# Altium PCB Bioscope-Input-01.PcbDoc
Units mm, origin at the board's own origin, x right, y up, seen from the top; angles counter-clockwise.
Board outline 100 x 50 mm, 2 copper layers (Top Layer, Bottom Layer); 54 components, 35 nets, 143 pads, 3 vias.
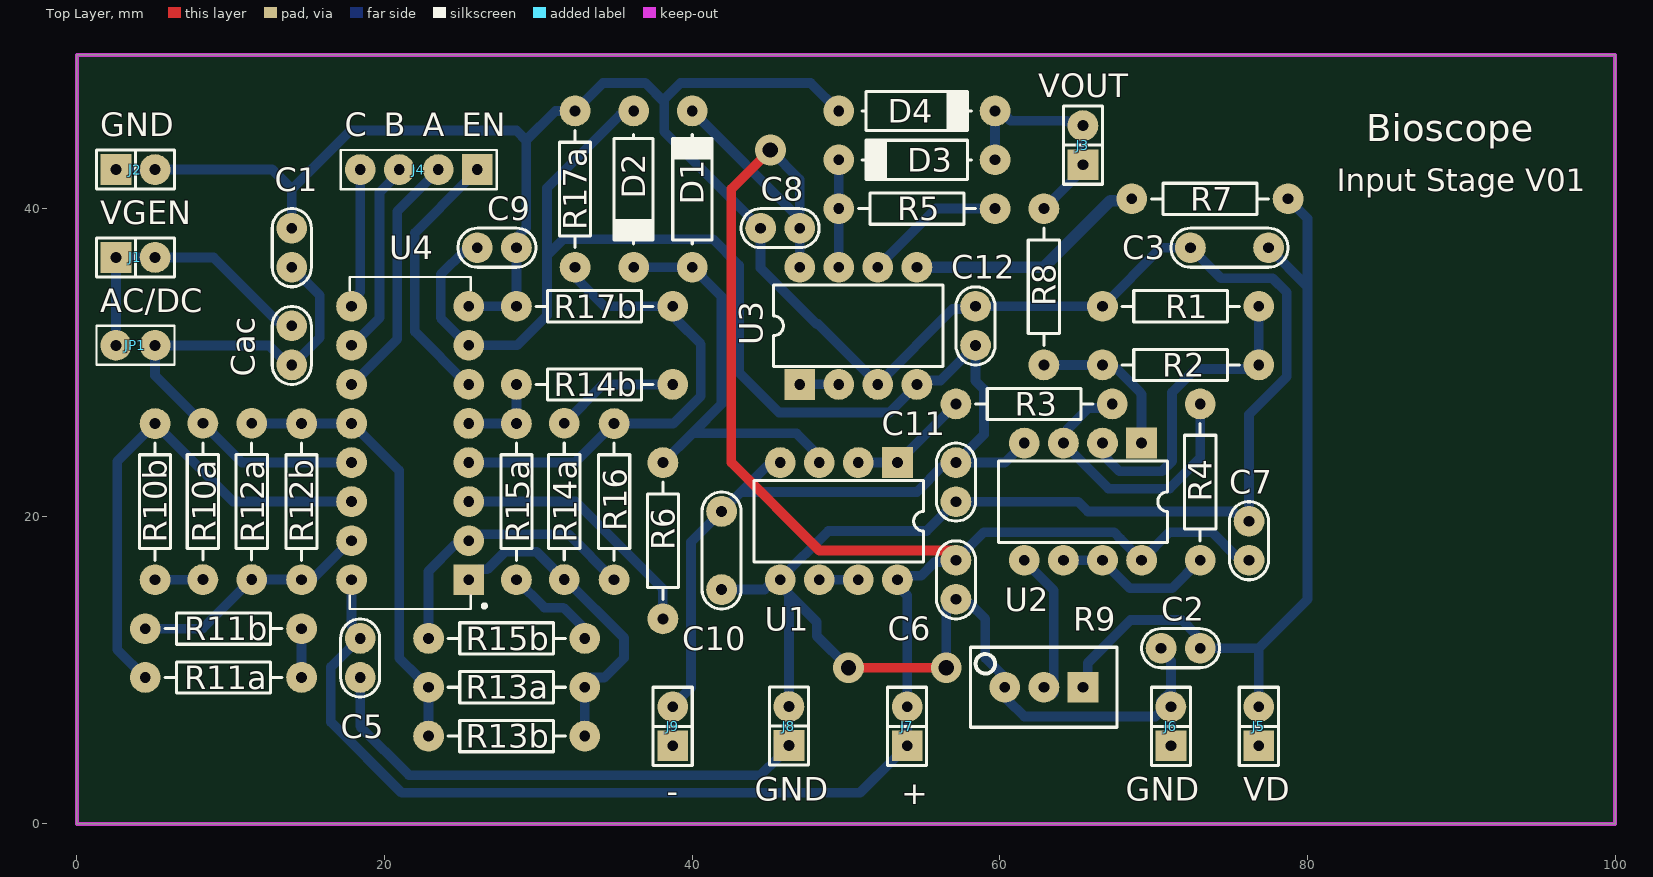
[diagram p0: Top Layer view]
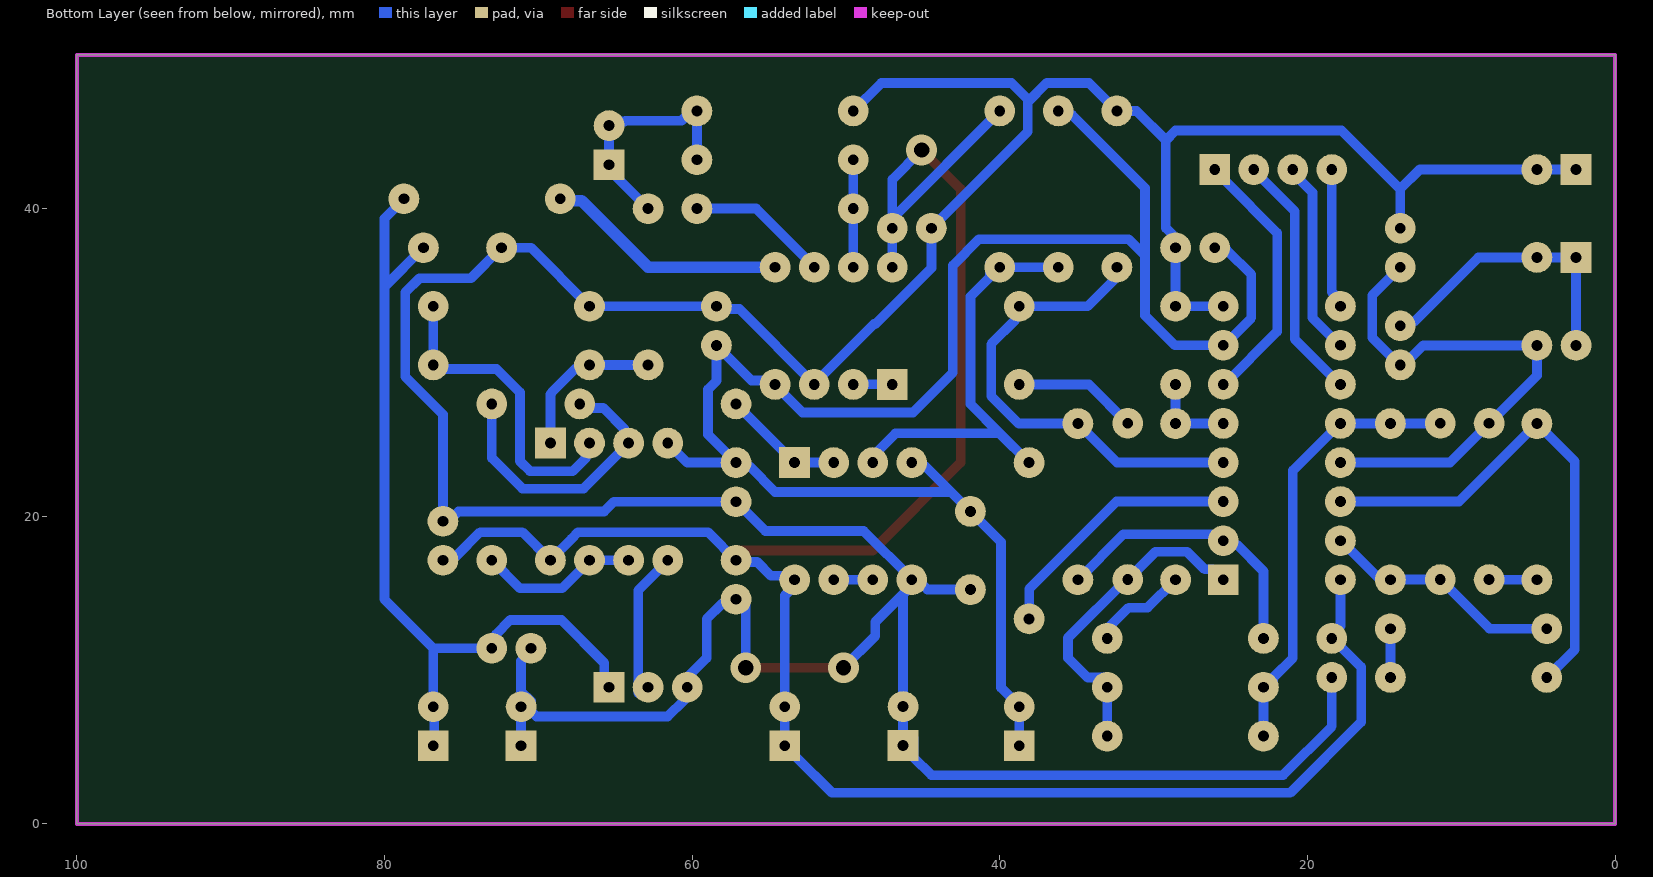
[diagram p1: Bottom Layer view, seen from below]

## Layer stack, top to bottom
Top Solder: solder mask 0.0102, Solder Resist, Dk 3.5
Top Layer: signal copper 0.0356
Dielectric 1: dielectric 0.32, FR-4, Dk 4.8
Bottom Layer: signal copper 0.0356
Bottom Solder: solder mask 0.0102, Solder Resist, Dk 3.5

## Board outline
0,0 0,50 100,50 100,0

## Design rules (kind name [scope] priority, off if disabled: settings)
Clearance [All] p1: gap=0.508 ignorepadtopadclearanceinfootprint=FALSE
ComponentClearance [All] p1: gap=0.254 collisioncheckmode=3 verticalgap=0 showdistances=FALSE
HoleSize [All] p1: absolutevalues=TRUE maxlimit=25.4 minlimit=0.025 maxpercent=80.000 minpercent=20.000
HoleToHoleClearance [All] p1: gap=0.762 allowstackedmicrovias=TRUE
PolygonConnect [All] p1: connectstyle=Relief reliefconductorwidth=0.254 reliefentries=4 polygonreliefangle="90 Angle" airgapwidth=0.254
RoutingVias [All] p1: holewidth=1 width=2 viastyle="Through Hole" minholewidth=1 minwidth=2 maxholewidth=1 maxwidth=2
SilkToSolderMaskClearance [IsPad] p1: minsilkscreentomaskgap=0 clearancetoexposedcopper=TRUE
SolderMaskExpansion [All] p1: expansion=0.102 istentingtop=FALSE
Width [All] p1: maxlimit=1.016 minlimit=0.635 preferedwidth=0.635
26 further rules are at their usual default settings.

## Components (designator, comment, footprint, x,y, rotation, side; value= is the part's Value field where it differs from the comment)
C1 "22pF" CAP100 13.97,37.465 r90 top
C2 "100nF" CAP100 71.755,11.43 r180 top
C3 "100nF" CAP200 74.93,37.465 r180 top
C5 "100nF" CAP100 18.415,10.795 r270 top
C6 "100nF" CAP100 57.15,15.875 r270 top
C7 "100nF" CAP100 76.2,18.415 r90 top
C8 "100nF" CAP100 45.72,38.735 r180 top
C9 "100nF" CAP100 27.305,37.465 r180 top
C10 "100nF" CAP200 41.91,17.78 r90 top
C11 "100nF" CAP100 57.15,22.225 r90 top
C12 "100nF" CAP100 58.42,32.385 r270 top
Cac "100nF" CAP100 13.97,31.115 r270 top
D1 "1N4148" DO41 40.005,41.275 r90 top
D2 "1N4148" DO41 36.195,41.275 r270 top
D3 "1N4148" DO41 54.61,43.18 r180 top
D4 "1N4148" DO41 54.61,46.355 r0 top
J1 "JUMPER" JUMPER2 3.81,36.83 r0 top
J2 "JUMPER" JUMPER2 3.81,42.545 r0 top
J3 "JUMPER" JUMPER2 65.405,44.133 r90 top
J4 "Pin Header 4F" PINHEADER-4F 22.225,42.545 r180 top
J5 "JUMPER" JUMPER2 76.835,6.35 r90 top
J6 "JUMPER" JUMPER2 71.12,6.35 r90 top
J7 "JUMPER" JUMPER2 53.975,6.35 r90 top
J8 "JUMPER" JUMPER2 46.29,6.365 r90 top
J9 "JUMPER" JUMPER2 38.735,6.35 r90 top
JP1 "Jumper" JUMPER-HEADER 3.81,31.115 r0 top
R1 "10K" RES400 66.675,33.655 r0 top
R2 "10K" RES400 76.835,29.845 r180 top
R3 "10K" RES400 57.15,27.305 r0 top
R4 "10K" RES400 73.025,17.145 r90 top
R5 "8.2K" RES400 59.69,40.005 r180 top
R6 "1K" RES400 38.1,13.335 r90 top
R7 "10K" RES400 78.74,40.64 r180 top
R8 "1K" RES400 62.865,29.845 r90 top
R9 "PRESET" "PRESET V" 62.865,8.89 r180 top
R10a "10K" RES400 8.19,15.89 r90 top
R10b "390K" RES400 5.08,26.035 r270 top
R11a "150K" RES400 14.605,9.525 r180 top
R11b "150K" RES400 4.445,12.7 r0 top
R12a "180K" RES400 11.365,26.05 r270 top
R12b "470K" RES400 14.605,26.035 r270 top
R13a "56K" RES400 33.02,8.89 r180 top
R13b "620K" RES400 33.02,5.715 r180 top
R14a "39K" RES400 31.685,26.05 r270 top
R14b "1K" RES400 28.575,28.575 r0 top
R15a "10K" RES400 28.575,15.875 r90 top
R15b "10K" RES400 22.86,12.065 r0 top
R16 "10K" RES400 34.925,26.035 r270 top
R17a "100K" RES400 32.385,46.355 r270 top
R17b "100K" RES400 28.575,33.655 r0 top
U1 "TL082P" P008 49.53,19.685 r180 top
U2 "LM833N" DIP8 65.405,20.955 r180 top
U3 "LM833N" DIP8 50.8,32.385 r0 top
U4 "CD4051" SOIC16 25.475,15.88 r180 top

## Footprints (in the part's own frame and the unit in brackets; to place one, negate y for a bottom-side part, rotate by r counter-clockwise, add the part's x,y. Pads: shape width x height; smd on the part's side, far side on the other; paste and mask are expansions set on the pad)
CAP100 [mm]
  round 2 hole 0.7: 1(-1.27,0) 2(1.27,0)
  silkscreen extent -2.54,-1.27 2.54,1.27, body extent -2.92,-0.84 2.92,0.86, height 6.12
CAP200 [mm]
  round 2 hole 0.7: 1(-2.54,0) 2(2.54,0)
  silkscreen extent -3.81,-1.27 3.81,1.27, body extent -2.79,-1.17 2.79,1.12, height 6.24
DIP8 [mm] "DIP; 8 Leads; Row Spacing 7.62 mm; Pitch 2.54 mm"
  rect 2x2 hole 0.7: 1(-3.81,-3.81)
  round 2 hole 0.7: 2(-1.27,-3.81) 3(1.27,-3.81) 4(3.81,-3.81) 5(3.81,3.81) 6(1.27,3.81) 7(-1.27,3.81) 8(-3.81,3.81)
  silkscreen extent -5.5,-2.65 5.5,2.65
DO41 [mm]
  round 2 hole 0.7: 1(-5.08,0) 2(5.08,0)
  silkscreen extent -3.56,-1.27 3.56,1.27, body extent -5.46,-1.19 5.46,1.37, height 2.03
JUMPER2 [mm]
  rect 2x2 hole 0.7: 1(-1.27,0)
  round 2 hole 0.7: 2(1.27,0)
  silkscreen extent -2.54,-1.27 2.54,1.27, body extent -2.46,-1.27 2.54,1.27, height 9.5
JUMPER-HEADER [mm]
  round 2 hole 0.7: 1(-1.27,0) 2(1.27,0)
  silkscreen extent -2.54,-1.27 2.54,1.27, body extent -2.54,-1.27 2.54,1.27, height 16.15
P008 [mm] "DIP; 8 Leads; Row Spacing 7.62 mm; Pitch 2.54 mm"
  rect 2x2 hole 0.7: 1(-3.81,-3.81)
  round 2 hole 0.7: 2(-1.27,-3.81) 3(1.27,-3.81) 4(3.81,-3.81) 5(3.81,3.81) 6(1.27,3.81) 7(-1.27,3.81) 8(-3.81,3.81)
  silkscreen extent -5.5,-2.65 5.5,2.65
PINHEADER-4F [mm]
  rect 2x2 hole 0.7: 1(-3.81,0)
  round 2 hole 0.7: 2(-1.27,0) 3(1.27,0) 4(3.81,0)
  silkscreen extent -5.08,-1.27 5.08,1.27, body extent -5.33,-1.27 5.33,1.27, height 8.51
"PRESET V" [mm]
  rect 2x2 hole 0.7: 1(-2.54,0)
  round 2 hole 0.7: 2(0,0) 3(2.54,0)
  silkscreen extent -4.76,-2.6 4.76,2.6, body extent -4.7,-2.42 4.83,2.42, height 11.55
RES400 [mm]
  round 2 hole 0.7: 1(0,0) 2(10.16,0)
  silkscreen extent 1.27,-1.02 8.89,1.02, body extent -0.3,-1.14 10.46,1.17, height 2.43
SOIC16 [mm]
  rect 2x2 hole 0.7: 1(0,0)
  round 2 hole 0.7: 2(0,-2.54) 3(0,-5.08) 4(0,-7.62) 5(0,-10.16) 6(0,-12.7) 7(0,-15.24) 8(0,-17.78) 9(7.62,-17.78) 10(7.62,-15.24) 11(7.62,-12.7) 12(7.62,-10.16) 13(7.62,-7.62) 14(7.62,-5.08) 15(7.62,-2.54) 16(7.62,0)
  silkscreen extent -1.12,-19.68 7.75,1.91, body extent -0.13,-19.56 7.86,1.78, height 2.21

## Part data
C1 C2 C3 C5 C6 C7 C8 C9 C10 C11 C12 Cac: library part CAP
D1 D2 D3 D4: library part DIODO
J4: library part PINHEADER-4F, "Pin Header, Female, 4 positions"
JP1: library part "Jumper Header", "2.54mm 2 pin header and jumper"
R1 R2 R3 R4 R5 R6 R7 R8 R10a R10b R11a R11b R12a R12b R13a R13b R14a R14b R15a R15b R16 R17a R17b: library part RES
U1: "JFET-Input Operational Amplifier", Code_JEDEC=MO-001-AN, ComponentLink1Description="Manufacturer Link", ComponentLink1URL=http://www.ti.com/, ComponentLink2Description=Datasheet, ComponentLink2URL=http://www-s.ti.com/sc/ds/tl082.pdf, DatasheetVersion=Feb-1999, LatestRevisionDate=04-Mar-2005, LatestRevisionNote="Stylized 3D Model Added.", PackageDescription="DIP; 8 Leads; Row Spacing 7.62 mm; Pitch 2.54 mm", PackageReference=P008, PackageVersion=Jun-1999, Published=16-Jan-2001, Publisher="Altium Limited"
U2 U3: "Low-Noise Dual Operational Amplifier", Code_JEDEC=MO-001-AN, ComponentLink1Description="Manufacturer Link", ComponentLink1URL=http://www.st.com/, ComponentLink2Description=Datasheet, ComponentLink2URL=http://www.st.com/stonline/products/literature/ds/2169/lm833.pdf, DatasheetVersion=Dec-1997, LatestRevisionDate=06-Jun-2005, LatestRevisionNote="Stylized 3D Model Added.", PackageDescription="DIP; 8 Leads; Row Spacing 7.62 mm; Pitch 2.54 mm", PackageReference=DIP8, Published=24-Aug-2001, Publisher="Altium Limited"
U4: library part CD4051BF, "Single 8-Channel Analog Multiplexer or Demultiplexer", Mfr_Name="Texas Instruments", RefDes=RefDes, Type=Type

## Via types
v1: diameter 2, hole 1, Top Layer to Bottom Layer, 3 vias

## Nets (pads, with @x,y where several pads share a name; then routed paths per layer and width w, separated by ;. In a path a pad name is that pad's centre, name@x,y a point inside that pad or via, vN(x,y) a via of type N, cw(c..) or ccw(c..) an arc to the next point about the centre after c; other vN are vias at no path point)
COMMUX: R6.1 U4.3 | length 16.9
  Bottom Layer w0.635: U4.3 32.422,20.96 38.094,15.288 38.094,13.341 R6.1
GND: C1.2 C2.2 C3.2 C5.2 C6.2 C7.2 C8.2 C9.1 C10.1 C11.1 C12.1 D4.1 J2.1 J2.2 J6.1 J6.2 J8.1 J8.2 R1.1 R9.3 R17a.1 R17b.1 U1.5 U3.3 U4.8 | length 267
  Top Layer w0.635: v1(50.165,10.16) v1(56.515,10.16)
  Bottom Layer w0.635: J2.1 J2.2 12.7,42.545 13.97,41.275 ; C1.2 13.97,41.275 ; C5.2 18.415,6.35 21.59,3.175 44.45,3.175 45.607,4.332 45.607,5.602 45.695,5.69 46.202,5.69 46.29,5.778 J8.2 46.29,14.936 ; U4.8 25.48,33.655 R17b.1 C9.1 28.755,37.645 28.755,38.28 29.21,38.735 29.21,44.45 ; C10.1 44.716,15.24 45.351,15.875 U1.5 ; D4.1 47.704,48.181 39.249,48.181 38.179,47.111 38.179,46.952 ; v1(50.165,10.16) 48.097,12.228 48.097,13.129 46.29,14.936 ; U3.3 U3.3@52.07,28.617 ; v1(56.515,10.16) 56.515,14.236 57.15,14.871 57.677,14.344 58.046,14.344 59.055,13.335 59.055,10.795 60.145,9.705 60.145,9.07 R9.3 60.505,8.71 60.505,8.075 61.595,6.985 70.116,6.985 70.751,7.62 J6.2 J6.1 ; J6.2@70.485,7.62 70.485,7.989 71.12,8.624 71.12,10.588 70.485,11.223 C2.2 ; C3.2@72.345,37.465 70.485,37.465 R1.1 C12.1 58.24,33.475 56.929,33.475 U3.3@52.07,28.617 ; C3.2 74.374,35.481 77.733,35.481 78.661,34.553 78.661,29.089 76.2,26.628 C7.2 75.831,19.685 75.196,20.32 65.722,20.32 65.087,20.955 C11.1 55.245,19.05 48.853,19.05 45.72,15.917 U1.5 ; 13.97,41.275 17.78,45.085 28.575,45.085 29.21,44.45 ; 29.21,44.45 31.115,46.355 R17a.1 34.211,48.181 36.951,48.181 38.179,46.952 ; 38.179,46.952 38.179,45.006 C8.2 44.45,36.153 48.096,32.508 48.179,32.508 U3.3@52.07,28.617 ; U1.5 45.72,15.506 46.29,14.936
NetD1_1: D1.1 D2.2 R6.2 U1.3 | length 27.6
  Bottom Layer w0.635: D2.2 D1.1 ; R6.2 40.005,25.4 ; D1.1@40.64,36.461 40.64,35.56 41.91,34.29 41.91,27.305 40.005,25.4 ; U1.3@48.16,24.03 46.79,25.4 40.005,25.4
NetJ4_1: J4.1 U4.6 | length 17.1
  Bottom Layer w0.635: U4.6@25.4,28.575 21.967,32.008 21.967,38.435 25.321,41.789 25.321,41.831 J4.1
NetJ4_2: J4.2 U4.11 | length 16.3
  Bottom Layer w0.635: U4.11@17.855,28.538 20.824,31.507 20.824,39.832 23.495,42.503 J4.2
NetJ4_3: J4.3 U4.10 | length 12.9
  Bottom Layer w0.635: U4.10@18.138,30.838 18.138,31.361 19.681,32.904 19.681,41.058 20.955,42.333 J4.3
NetJ4_4: J4.4 U4.9 | length 8.3
  Bottom Layer w0.635: U4.9@18.153,34.327 18.415,34.589 J4.4
NetR1_2: R1.2 R2.1 U2.2 | length 20.6
  Bottom Layer w0.635: U2.2 66.936,24.504 66.936,23.765 67.761,22.939 70.557,22.939 71.199,23.582 71.199,28.061 72.722,29.584 76.574,29.584 R2.1 R1.2
NetR2_2: R2.2 R8.1 U2.1 | length 10.3
  Bottom Layer w0.635: R8.1 R2.2 66.936,29.584 67.613,29.584 69.136,28.061 69.136,28.019 69.215,27.94 U2.1
NetR3_1: R3.1 U1.1 U1.2 | length 7.9
  Bottom Layer w0.635: U1.2 U1.1 R3.1
NetR3_2: R3.2 R4.2 U2.3 | length 19.4
  Bottom Layer w0.635: R3.2 67.049,27.044 65.779,27.044 64.396,25.661 64.396,25.026 U2.3 64.135,24.723 67.062,21.796 71.03,21.796 73.025,23.791 R4.2 ; R4.2@73.025,27.601 R4.2@73.025,27.94
NetR5_1: R5.1 U3.6 | length 9.2
  Bottom Layer w0.635: U3.6 52.07,36.237 55.838,40.005 R5.1
NetR7_2: R7.2 U3.5 | length 15.8
  Bottom Layer w0.762: U3.5 62.865,36.195 67.192,40.522 68.462,40.522 R7.2
NetR9_2: R9.2 U2.5 | length 9.4
  Bottom Layer w0.635: U2.5 61.595,17.103 63.5,15.198 R9.2@63.5,8.51
NetR10a_1: R10a.1 R10b.2 | length 3.1
  Bottom Layer w0.635: R10b.2 5.088,15.883 8.182,15.883 R10a.1
NetR10b_1: R10b.1 R11a.2 U4.14 | length 33.2
  Bottom Layer w0.635: R11a.2 2.619,11.351 2.619,23.574 R10b.1 10.155,20.96 U4.14
NetR11a_1: R11a.1 R11b.2 | length 3.2
  Bottom Layer w0.635: R11a.1 R11b.2
NetR11b_1: R11b.1 R12a.2 R12b.2 U4.15 | length 15.8
  Bottom Layer w0.635: R11b.1 8.175,12.7 R12a.2 15.283,15.89 17.813,18.42 U4.15
NetR12a_1: R12a.1 R12b.1 R13a.2 R13b.2 U4.12 | length 27.8
  Bottom Layer w0.635: R12a.1 11.37,26.045 14.605,26.045 17.85,26.045 U4.12 17.897,26.04 20.955,22.982 20.955,10.795 22.225,9.525 R13a.2@22.225,8.89 ; R13b.2@22.86,6.534 R13a.2
NetR13a_1: R13a.1 R13b.1 R14a.2 U4.1 | length 21.1
  Bottom Layer w0.635: U4.1 26.158,16.563 26.681,16.563 27.819,17.701 29.874,17.701 R14a.2 31.777,15.89 35.56,12.107 35.56,10.795 34.29,9.525 33.02,9.525 R13b.1@33.02,5.939
NetR14a_1: R14a.1 R14b.2 | length 8.1
  Bottom Layer w0.635: R14a.1 34.21,28.575 R14b.2
NetR14b_1: R14b.1 R15a.2 U4.5 | length 5.6
  Bottom Layer w0.635: U4.5 25.478,26.038 28.572,26.038 R15a.2 R14b.1
NetR15a_1: R15a.1 R15b.2 | length 5.8
  Bottom Layer w0.635: R15a.1 30.385,14.065 31.623,14.065 32.988,12.7 R15b.2@33.02,12.7
NetR15b_1: R15b.1 R16.2 U4.2 | length 18
  Bottom Layer w0.635: R15b.1@22.86,12.7 22.86,16.432 24.586,18.159 25.214,18.159 U4.2 25.844,18.42 26.268,18.844 31.956,18.844 R16.2
NetR16_1: R16.1 R17a.2 R17b.2 U4.4 | length 31.2
  Bottom Layer w0.635: U4.4 32.39,23.5 R16.1 38.777,26.035 40.561,27.819 40.561,31.194 38.996,32.759 38.996,33.394 R17b.2 34.29,33.655 32.646,35.299 32.646,35.934 R17a.2
NetU1_6: U1.6 U1.7 | length 2.5
  Bottom Layer w0.635: U1.6 U1.7
NetU3_1: U3.1 U3.2 | length 2.5
  Bottom Layer w0.635: U3.1@46.99,28.59 U3.2@49.53,28.59
VCC+: C5.1 C6.1 C7.1 C8.1 D1.2 J7.1 J7.2 U1.8 U2.8 U3.8 U4.16 | length 145.4
  Top Layer w0.635: v1(45.085,43.815) 42.545,41.275 42.545,23.495 48.26,17.78 C6.1@57.15,17.78 ; U1.8@53.079,16.136 U1.8
  Bottom Layer w0.635: U4.16 17.855,12.879 18.415,12.319 C5.1 18.373,12.065 16.51,10.202 16.51,6.639 21.117,2.032 50.923,2.032 53.288,4.397 53.292,4.397 53.971,5.076 J7.1@53.971,5.08 ; D1.2 C8.1@46.99,39.37 ; v1(45.085,43.815) 46.99,41.91 C8.1@46.99,39.37 ; U3.8 C8.1 C8.1@46.99,39.37 ; J7.1 J7.2 53.975,14.871 53.34,15.506 U1.8 53.601,16.136 54.871,16.136 55.769,17.034 57.039,17.034 58.976,18.971 67.431,18.971 67.86,18.542 69.215,17.187 U2.8 71.041,18.971 73.781,18.971 75.345,17.406 75.939,17.406 C7.1
VCC-: C9.2 C10.2 C11.2 C12.2 D2.1 J9.1 J9.2 U1.4 U2.4 U3.4 U4.7 | length 119.3
  Bottom Layer w0.635: C9.2 25.855,37.285 25.22,37.285 23.65,35.715 23.65,32.904 25.433,31.12 U4.7 28.622,31.12 30.559,33.058 30.559,36.951 ; D2.1 35.934,46.094 35.299,46.094 30.559,41.354 30.559,36.951 ; J9.1 J9.2 38.735,7.673 39.926,8.864 39.926,18.336 C10.2 43.18,21.59 ; U1.4 45.459,23.234 44.824,23.234 43.18,21.59 ; U2.4 60.325,23.495 C11.2 ; 30.559,36.951 31.629,38.021 41.354,38.021 43.053,36.322 43.053,29.345 45.648,26.749 52.826,26.749 54.61,28.533 U3.4 54.871,28.836 56.141,28.836 C12.2 58.42,28.813 58.976,28.257 58.976,25.321 C11.2 ; 43.18,21.59 54.61,21.59 56.254,23.234 56.889,23.234 C11.2
VD: C2.1 C3.1 J5.1 J5.2 R7.1 R9.1 | length 56.1
  Bottom Layer w0.635: R9.1 65.716,9.201 65.716,10.471 68.501,13.256 71.834,13.256 72.764,12.326 72.764,11.691 C2.1 76.835,11.43 ; J5.2@76.765,7.62 76.765,5.15 J5.1 ; J5.2 76.835,11.43 ; C3.1 80.01,34.925 ; R7.1 80.01,39.37 80.01,34.925 ; 76.835,11.43 80.01,14.605 80.01,34.925
VD+: D3.2 R5.2 U3.7 | length 7
  Bottom Layer w0.635: U3.7 R5.2 D3.2
VGEN: Cac.1 J1.1 J1.2 JP1.1 | length 19.4
  Bottom Layer w0.635: JP1.1@2.54,30.722 J1.1 J1.2 8.89,36.83 13.074,32.646 13.709,32.646 Cac.1
VMED: C1.1 Cac.2 JP1.2 R10a.2 U4.13 | length 33.8
  Bottom Layer w0.635: C1.1@14.372,35.793 15.796,34.369 15.796,31.629 14.012,29.845 Cac.2 13.749,29.845 12.479,31.115 JP1.2 5.08,29.16 R10a.2 10.74,23.5 U4.13
VOUT: D3.1 D4.2 J3.1 J3.2 R8.2 | length 15.4
  Bottom Layer w0.635: D3.1 D4.2 60.059,46.355 60.694,45.72 64.351,45.72 64.407,45.664 65.144,45.664 J3.2 65.405,43.497 J3.1 ; R8.2 J3.1@65.405,42.545
VREF: R4.1 U2.6 U2.7 | length 10.4
  Bottom Layer w0.635: U2.6 U2.7 66.675,17.103 68.459,15.319 71.199,15.319 R4.1

## Keep-outs
Keep-Out Layer:
  the board outline again, w0.254

## Silkscreen, mask and mechanical layers (free items; w line width, h text height)
Top Overlay:
  text "VOUT" at 62.484,47.244 h1.52
  text "GND" at 1.524,44.704 h1.52
  text "C" at 17.399,44.704 h1.52
  text "B" at 19.939,44.704 h1.52
  text "A" at 22.479,44.704 h1.52
  text "EN" at 25.019,44.704 h1.52
  text "Bioscope" at 83.82,43.815 h3
  text "Input Stage V01" at 81.915,40.64 h2.5
  text "VGEN" at 1.524,38.989 h1.52
  text "AC/DC" at 1.524,33.274 h1.52
  text "GND" at 44.069,1.524 h1.52
  text "GND" at 68.199,1.524 h1.52
  text "VD" at 75.819,1.524 h1.52
  text "-" at 38.354,1.397 h1.52
  text "+" at 53.594,1.27 h1.52

## Text inside footprints (layer, text, board x,y; h text height)
U4: Mechanical 13 "*" at 25.539,16.515 h1.27 r180